# Altium PCB FPC_15ICS_80LEDS_150MM.PcbDoc (part 2 of 2)
Units mil, origin at the board's own origin, x right, y up, seen from the top; angles counter-clockwise.
Board outline 6000 x 4000 mil, 2 copper layers (Top Layer, Bottom Layer); 126 components, 275 nets, 763 pads, 146 vias.
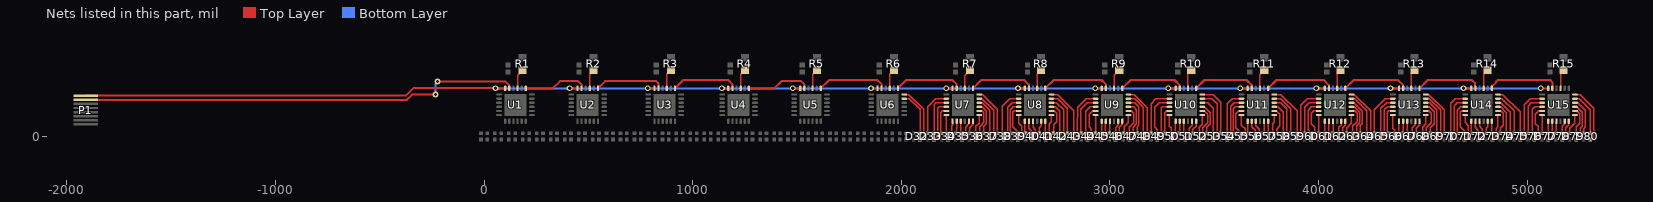
[diagram p2: the nets of this part, all layers, seen from the top]

## Via types
v1: diameter 27.56, hole 15.75, Top Layer to Bottom Layer, tented both sides, 146 vias

## Nets (pads, with @x,y where several pads share a name; then routed paths per layer and width w, separated by ;. In a path a pad name is that pad's centre, name@x,y a point inside that pad or via, vN(x,y) a via of type N, cw(c..) or ccw(c..) an arc to the next point about the centre after c; other vN are vias at no path point) (continued)
NetD32_3: D32.3 U6.17 | length 212.1
  Top Layer w6: U6.17@2013.74,180.79 2039.21,180.79 2089.96,130.04 D32.3@2089.96,15.16
NetD32_4: D32.4 U6.18 | length 275.4
  Top Layer w6: U6.18@2013.74,200.47 2036.5,200.47 2107.82,129.15 2107.82,2.57 2090.09,-15.16 D32.4@2089.96,-15.16
NetD33_2: D33.2 U7.2 | length 232.3
  Top Layer w6: D33.2@2126.57,15.16 2126.57,141.57 2165.79,180.79 U7.2@2216.26,180.79
NetD33_3: D33.3 U7.3 | length 199.9
  Top Layer w6: D33.3@2156.89,15.16 2156.89,151.89 2166.1,161.1 U7.3@2216.26,161.1
NetD33_4: D33.4 U7.4 | length 201.7
  Top Layer w6: D33.4@2156.89,-15.16 2157.02,-15.16 2174.75,2.57 2174.75,134.75 2181.42,141.42 U7.4@2216.26,141.42
NetD34_2: D34.2 U7.5 | length 131.6
  Top Layer w6: D34.2@2193.5,15.16 2188.48,20.18 2188.48,113.48 2196.73,121.73 U7.5@2216.26,121.73
NetD34_3: D34.3 U7.6 | length 90
  Top Layer w6: U7.6@2216.26,102.05 2216.26,22.72 D34.3@2223.82,15.16
NetD34_4: D34.4 U7.7 | length 97.4
  Top Layer w6: D34.4@2223.82,-15.16 2224.84,-15.16 2241.68,1.68 2241.68,51.68 2245.79,55.79 U7.7@2245.79,72.52
NetD35_2: D35.2 U7.8 | length 59.4
  Top Layer w6: D35.2@2260.43,15.16 2265.47,20.2 U7.8@2265.47,72.52
NetD35_3: D35.3 U7.9 | length 59.7
  Top Layer w6: U7.9@2285.16,72.52 2285.16,20.75 D35.3@2290.75,15.16
NetD35_4: D35.4 U7.11 | length 104.1
  Top Layer w6: D35.4@2290.75,-15.16 2294.84,-15.16 2308.61,-1.39 2308.61,43.61 2324.53,59.53 U7.11@2324.53,72.52
NetD36_2: D36.2 U7.12 | length 64.3
  Top Layer w6: D36.2@2327.36,15.16 2327.36,42.36 2344.21,59.21 U7.12@2344.21,72.52
NetD36_3: D36.3 U7.13 | length 93.5
  Top Layer w6: D36.3@2357.68,15.16 2357.68,47.68 2373.74,63.74 U7.13@2373.74,102.05
NetD36_4: D36.4 U7.14 | length 171.3
  Top Layer w6: D36.4@2357.68,-15.16 2358.34,-15.16 2375.54,2.04 2375.54,45.54 2396.52,66.52 2396.52,113.48 2388.27,121.73 U7.14@2373.74,121.73
NetD37_2: D37.2 U7.15 | length 155.3
  Top Layer w6: U7.15@2373.74,141.42 2388.58,141.42 2408.52,121.48 2408.52,61.55 2394.29,47.32 D37.2@2394.29,15.16
NetD37_3: D37.3 U7.16 | length 175.9
  Top Layer w6: U7.16@2373.74,161.1 2388.9,161.1 2424.61,125.39 D37.3@2424.61,15.16
NetD37_4: D37.4 U7.17 | length 239.2
  Top Layer w6: U7.17@2373.74,180.79 2386.18,180.79 2442.47,124.5 2442.47,2.47 2424.84,-15.16 D37.4@2424.61,-15.16
NetD38_2: D38.2 U7.18 | length 230.8
  Top Layer w6: U7.18@2373.74,200.47 2389.53,200.47 2461.22,128.78 D38.2@2461.22,15.16
NetD38_3: D38.3 U8.2 | length 225
  Top Layer w6: D38.3@2491.54,15.16 2485,21.7 2485,145 2520.79,180.79 U8.2@2562.6,180.79
NetD38_4: D38.4 U8.3 | length 224.2
  Top Layer w6: D38.4@2491.54,-15.16 2491.66,-15.16 2510,3.18 2510,140 2531.1,161.1 U8.3@2562.6,161.1
NetD39_2: D39.2 U8.4 | length 161
  Top Layer w6: D39.2@2528.15,15.16 2522,21.31 2522,127 2536.42,141.42 U8.4@2562.6,141.42
NetD39_3: D39.3 U8.5 | length 139.9
  Top Layer w6: D39.3@2558.47,15.16 2558.47,21.53 2535,45 2535,115 2541.73,121.73 U8.5@2562.6,121.73
NetD39_4: D39.4 U8.6 | length 130.4
  Top Layer w6: D39.4@2558.47,-15.16 2558.59,-15.16 2576.33,2.57 2576.33,48.67 2562.6,62.4 U8.6@2562.6,102.05
NetD40_2: D40.2 U8.7 | length 58.6
  Top Layer w6: U8.7@2592.13,72.52 2592.13,18.11 D40.2@2595.08,15.16
NetD40_3: D40.3 U8.8 | length 63
  Top Layer w6: U8.8@2611.81,72.52 2611.81,38.19 2625.4,24.6 D40.3@2625.4,15.16
NetD40_4: D40.4 U8.9 | length 100
  Top Layer w6: D40.4@2625.4,-15.16 2625.52,-15.16 2643.25,2.57 2643.25,31.75 2631.5,43.5 U8.9@2631.5,72.52
NetD41_2: D41.2 U8.11 | length 61
  Top Layer w6: D41.2@2662.01,15.16 2662.01,42.01 2670.87,50.87 U8.11@2670.87,72.52
NetD41_3: D41.3 U8.12 | length 58.1
  Top Layer w6: U8.12@2690.55,72.52 2690.55,16.93 D41.3@2692.33,15.16
NetD41_4: D41.4 U8.13 | length 128.9
  Top Layer w6: D41.4@2692.33,-15.16 2692.45,-15.16 2710.18,2.57 2710.18,27.75 2710,27.93 2710,60 2720.08,70.08 U8.13@2720.08,102.05
NetD42_2: D42.2 U8.14 | length 131.3
  Top Layer w6: U8.14@2720.08,121.73 2733.27,121.73 2745,110 2745,70 2730,55 2730,16.23 D42.2@2728.93,15.16
NetD42_3: D42.3 U8.15 | length 153.9
  Top Layer w6: U8.15@2720.08,141.42 2738.58,141.42 2760,120 2760,15.91 D42.3@2759.25,15.16
NetD42_4: D42.4 U8.16 | length 222
  Top Layer w6: U8.16@2720.08,161.1 2743.9,161.1 2778.01,126.99 2778.01,3.47 2759.38,-15.16 D42.4@2759.25,-15.16
NetD43_2: D43.2 U8.17 | length 214.1
  Top Layer w6: U8.17@2720.08,180.79 2749.21,180.79 2795.86,134.14 D43.2@2795.86,15.16
NetD43_3: D43.3 U8.18 | length 246.5
  Top Layer w6: U8.18@2720.08,200.47 2749.53,200.47 2826.18,123.82 D43.3@2826.18,15.16
NetD43_4: D43.4 U9.2 | length 266.5
  Top Layer w6: D43.4@2826.18,-15.16 2826.31,-15.16 2844.04,2.57 2844.04,89.04 2845,90 2845,140 2885.79,180.79 U9.2@2931.54,180.79
NetD44_2: D44.2 U9.3 | length 200.4
  Top Layer w6: D44.2@2862.79,15.16 2860,17.95 2860,130 2891.1,161.1 U9.3@2931.54,161.1
NetD44_3: D44.3 U9.4 | length 163.6
  Top Layer w6: D44.3@2893.11,15.16 2885,23.27 2885,120 2906.42,141.42 U9.4@2931.54,141.42
NetD44_4: D44.4 U9.5 | length 170.6
  Top Layer w6: D44.4@2893.11,-15.16 2893.24,-15.16 2910.97,2.57 2910.97,34.03 2900,45 2900,105 2916.73,121.73 U9.5@2931.54,121.73
NetD45_2: D45.2 U9.6 | length 87.6
  Top Layer w6: D45.2@2929.72,15.16 2931.54,16.97 U9.6@2931.54,102.05
NetD45_3: D45.3 U9.7 | length 57.8
  Top Layer w6: D45.3@2960.04,15.16 2961.06,16.18 U9.7@2961.06,72.52
NetD45_4: D45.4 U9.8 | length 96.3
  Top Layer w6: D45.4@2960.04,-15.16 2960.17,-15.16 2977.9,2.57 2977.9,69.67 U9.8@2980.75,72.52
NetD46_2: D46.2 U9.9 | length 58.9
  Top Layer w6: D46.2@2996.65,15.16 3000.43,18.94 U9.9@3000.43,72.52
NetD46_3: D46.3 U9.11 | length 62.7
  Top Layer w6: D46.3@3026.97,15.16 3026.97,41.97 3039.8,54.8 U9.11@3039.8,72.52
NetD46_4: D46.4 U9.12 | length 101.2
  Top Layer w6: D46.4@3026.97,-15.16 3027.1,-15.16 3044.83,2.57 3044.83,42.86 3059.49,57.52 U9.12@3059.49,72.52
NetD47_2: D47.2 U9.13 | length 97.4
  Top Layer w6: D47.2@3063.58,15.16 3070,21.58 3070,45 3089.02,64.02 U9.13@3089.02,102.05
NetD47_3: D47.3 U9.14 | length 134.4
  Top Layer w6: U9.14@3089.02,121.73 3103.27,121.73 3115,110 3115,65 3093.9,43.9 D47.3@3093.9,15.16
NetD47_4: D47.4 U9.15 | length 200.5
  Top Layer w6: U9.15@3089.02,141.42 3113.58,141.42 3127,128 3127,60.03 3111.76,44.79 3111.76,2.57 3094.03,-15.16 D47.4@3093.9,-15.16
NetD48_2: D48.2 U9.16 | length 187.7
  Top Layer w6: U9.16@3089.02,161.1 3118.9,161.1 3139,141 3139,55.06 3130.51,46.57 D48.2@3130.51,15.16
NetD48_3: D48.3 U9.17 | length 213.1
  Top Layer w6: U9.17@3089.02,180.79 3119.21,180.79 3160,140 3160,15.99 D48.3@3160.83,15.16
NetD48_4: D48.4 U9.18 | length 276.3
  Top Layer w6: U9.18@3089.02,200.47 3116.5,200.47 3172,144.97 3172,143 3178.69,136.31 3178.69,2.57 3160.95,-15.16 D48.4@3160.83,-15.16
NetD49_2: D49.2 U10.2 | length 240.3
  Top Layer w6: D49.2@3197.44,15.16 3197.44,157.44 3220.79,180.79 U10.2@3285.79,180.79
NetD49_3: D49.3 U10.3 | length 209.7
  Top Layer w6: D49.3@3227.76,15.16 3227.76,32.24 3215,45 3215,140 3236.1,161.1 U10.3@3285.79,161.1
NetD49_4: D49.4 U10.4 | length 200.8
  Top Layer w6: D49.4@3227.76,-15.16 3227.88,-15.16 3246.51,3.47 3246.51,136.51 3251.42,141.42 U10.4@3285.79,141.42
NetD50_2: D50.2 U10.5 | length 125.6
  Top Layer w6: D50.2@3264.37,15.16 3263.01,15.16 3263.01,113.01 3271.73,121.73 U10.5@3285.79,121.73
NetD50_3: D50.3 U10.6 | length 90.6
  Top Layer w6: U10.6@3285.79,102.05 3285.79,49.21 3294.69,40.31 D50.3@3294.69,15.16
NetD50_4: D50.4 U10.7 | length 96.3
  Top Layer w6: D50.4@3294.69,-15.16 3294.81,-15.16 3312.55,2.57 3312.55,69.75 U10.7@3315.32,72.52
NetD51_2: D51.2 U10.8 | length 58.9
  Top Layer w6: D51.2@3331.3,15.16 3335,18.86 U10.8@3335,72.52
NetD51_3: D51.3 U10.9 | length 60.2
  Top Layer w6: U10.9@3354.69,72.52 3354.69,22.09 D51.3@3361.62,15.16
NetD51_4: D51.4 U10.11 | length 101.2
  Top Layer w6: D51.4@3361.62,-15.16 3361.74,-15.16 3379.48,2.57 3379.48,39.48 3394.06,54.06 U10.11@3394.06,72.52
NetD52_2: D52.2 U10.12 | length 63.8
  Top Layer w6: D52.2@3398.23,15.16 3398.23,33.23 3413.74,48.74 U10.12@3413.74,72.52
NetD52_3: D52.3 U10.13 | length 93
  Top Layer w6: D52.3@3428.55,15.16 3428.55,43.55 3443.27,58.27 U10.13@3443.27,102.05
NetD52_4: D52.4 U10.14 | length 171.1
  Top Layer w6: D52.4@3428.55,-15.16 3428.67,-15.16 3446.4,2.57 3446.4,41.4 3470,65 3470,105 3453.27,121.73 U10.14@3443.27,121.73
NetD53_2: D53.2 U10.15 | length 155.4
  Top Layer w6: U10.15@3443.27,141.42 3453.58,141.42 3482,113 3482,60.03 3465,43.03 3465,15.31 D53.2@3465.15,15.16
NetD53_3: D53.3 U10.16 | length 182.6
  Top Layer w6: U10.16@3443.27,161.1 3468.9,161.1 3495.47,134.53 D53.3@3495.47,15.16
NetD53_4: D53.4 U10.17 | length 260.1
  Top Layer w6: U10.17@3443.27,180.79 3489.21,180.79 3514.23,155.77 3514.23,3.47 3495.6,-15.16 D53.4@3495.47,-15.16
NetD54_2: D54.2 U10.18 | length 252.1
  Top Layer w6: U10.18@3443.27,200.47 3494.53,200.47 3532.08,162.92 D54.2@3532.08,15.16
NetD54_3: D54.3 U11.2 | length 220.3
  Top Layer w6: D54.3@3562.4,15.16 3562.4,157.4 3585.79,180.79 U11.2@3630.79,180.79
NetD54_4: D54.4 U11.3 | length 225
  Top Layer w6: D54.4@3562.4,-15.16 3562.53,-15.16 3580.26,2.57 3580.26,145.26 3596.1,161.1 U11.3@3630.79,161.1
NetD55_2: D55.2 U11.4 | length 162.2
  Top Layer w6: D55.2@3599.01,15.16 3592.26,21.91 3592.26,132.26 3601.42,141.42 U11.4@3630.79,141.42
NetD55_3: D55.3 U11.5 | length 136.2
  Top Layer w6: D55.3@3629.33,15.16 3629.33,15.67 3604.26,40.74 3604.26,109.26 3616.73,121.73 U11.5@3630.79,121.73
NetD55_4: D55.4 U11.6 | length 135.4
  Top Layer w6: D55.4@3629.33,-15.16 3634.84,-15.16 3648.08,-1.92 3648.08,36.92 3630.79,54.21 U11.6@3630.79,102.05
NetD56_2: D56.2 U11.7 | length 59.7
  Top Layer w6: U11.7@3660.32,72.52 3660.32,20.79 D56.2@3665.94,15.16
NetD56_3: D56.3 U11.8 | length 64.1
  Top Layer w6: U11.8@3680,72.52 3680,45 3696.26,28.74 D56.3@3696.26,15.16
NetD56_4: D56.4 U11.9 | length 101.9
  Top Layer w6: D56.4@3696.26,-15.16 3696.39,-15.16 3715,3.45 3715,35 3699.69,50.31 U11.9@3699.69,72.52
NetD57_2: D57.2 U11.11 | length 59.9
  Top Layer w6: D57.2@3732.87,15.16 3739.06,21.34 U11.11@3739.06,72.52
NetD57_3: D57.3 U11.12 | length 59.2
  Top Layer w6: U11.12@3758.74,72.52 3758.74,19.61 D57.3@3763.19,15.16
NetD57_4: D57.4 U11.13 | length 127.7
  Top Layer w6: D57.4@3763.19,-15.16 3763.32,-15.16 3781.05,2.57 3781.05,61.05 3788.27,68.27 U11.13@3788.27,102.05
NetD58_2: D58.2 U11.14 | length 129.8
  Top Layer w6: U11.14@3788.27,121.73 3798.27,121.73 3815,105 3815,50 3799.8,34.8 D58.2@3799.8,15.16
NetD58_3: D58.3 U11.15 | length 152.6
  Top Layer w6: U11.15@3788.27,141.42 3803.58,141.42 3830.12,114.88 D58.3@3830.12,15.16
NetD58_4: D58.4 U11.16 | length 227.1
  Top Layer w6: U11.16@3788.27,161.1 3818.9,161.1 3848.87,131.13 3848.87,3.47 3830.25,-15.16 D58.4@3830.12,-15.16
NetD59_2: D59.2 U11.17 | length 216.3
  Top Layer w6: U11.17@3788.27,180.79 3819.21,180.79 3866.73,133.27 D59.2@3866.73,15.16
NetD59_3: D59.3 U11.18 | length 248.7
  Top Layer w6: U11.18@3788.27,200.47 3819.53,200.47 3897.05,122.95 D59.3@3897.05,15.16
NetD59_4: D59.4 U12.2 | length 271.2
  Top Layer w6: D59.4@3897.05,-15.16 3897.17,-15.16 3914.91,2.57 3914.91,149.91 3945.79,180.79 U12.2@4000.79,180.79
NetD60_2: D60.2 U12.3 | length 199.9
  Top Layer w6: D60.2@3933.66,15.16 3933.66,138.66 3956.1,161.1 U12.3@4000.79,161.1
NetD60_3: D60.3 U12.4 | length 173.2
  Top Layer w6: D60.3@3963.98,15.16 3963.98,15.28 3950,29.26 3950,125 3966.42,141.42 U12.4@4000.79,141.42
NetD60_4: D60.4 U12.5 | length 180.3
  Top Layer w6: D60.4@3963.98,-15.16 3964.1,-15.16 3981.84,2.57 3981.84,43.16 3965,60 3965,110 3976.73,121.73 U12.5@4000.79,121.73
NetD61_2: D61.2 U12.6 | length 87
  Top Layer w6: D61.2@4000.59,15.16 4000.79,15.36 U12.6@4000.79,102.05
NetD61_3: D61.3 U12.7 | length 57.6
  Top Layer w6: U12.7@4030.32,72.52 4030.32,15.75 D61.3@4030.91,15.16
NetD61_4: D61.4 U12.8 | length 95.7
  Top Layer w6: D61.4@4030.91,-15.16 4031.03,-15.16 4048.77,2.57 4048.77,71.29 U12.8@4050,72.52
NetD62_2: D62.2 U12.9 | length 58.3
  Top Layer w6: D62.2@4067.52,15.16 4069.69,17.33 U12.9@4069.69,72.52
NetD62_3: D62.3 U12.11 | length 62
  Top Layer w6: D62.3@4097.84,15.16 4097.84,42.84 4109.06,54.06 U12.11@4109.06,72.52
NetD62_4: D62.4 U12.12 | length 100.6
  Top Layer w6: D62.4@4097.84,-15.16 4097.96,-15.16 4115.7,2.57 4115.7,40.7 4128.74,53.74 U12.12@4128.74,72.52
NetD63_2: D63.2 U12.13 | length 96.6
  Top Layer w6: D63.2@4134.84,15.16 4134.84,39.84 4158.27,63.27 U12.13@4158.27,102.05
NetD63_3: D63.3 U12.14 | length 134.6
  Top Layer w6: U12.14@4158.27,121.73 4173.27,121.73 4185,110 4185,70 4165.16,50.16 D63.3@4165.16,15.16
NetD63_4: D63.4 U12.15 | length 193.1
  Top Layer w6: U12.15@4158.27,141.42 4170.55,141.42 4197,114.97 4197,65.03 4183.52,51.55 4183.52,3.07 4165.28,-15.16 D63.4@4165.16,-15.16
NetD64_2: D64.2 U12.16 | length 176.3
  Top Layer w6: U12.16@4158.27,161.1 4168.9,161.1 4209,121 4209,60.06 4201.38,52.43 D64.2@4201.38,15.16
NetD64_3: D64.3 U12.17 | length 205.4
  Top Layer w6: U12.17@4158.27,180.79 4174.21,180.79 4231.7,123.3 D64.3@4231.7,15.16
NetD64_4: D64.4 U12.18 | length 269
  Top Layer w6: U12.18@4158.27,200.47 4171.5,200.47 4250,121.97 4250,3.02 4231.82,-15.16 D64.4@4231.7,-15.16
NetD65_2: D65.2 U13.2 | length 223.3
  Top Layer w6: D65.2@4268.3,15.16 4268.3,128.3 4320.79,180.79 U13.2@4356.73,180.79
NetD65_3: D65.3 U13.3 | length 188
  Top Layer w6: D65.3@4298.62,15.16 4298.62,133.62 4326.1,161.1 U13.3@4356.73,161.1
NetD65_4: D65.4 U13.4 | length 195.5
  Top Layer w6: D65.4@4298.62,-15.16 4298.75,-15.16 4316.48,2.57 4316.48,126.48 4331.42,141.42 U13.4@4356.73,141.42
NetD66_2: D66.2 U13.5 | length 131.5
  Top Layer w6: D66.2@4335.23,15.16 4330,20.39 4330,115 4336.73,121.73 U13.5@4356.73,121.73
NetD66_3: D66.3 U13.6 | length 90.5
  Top Layer w6: U13.6@4356.73,102.05 4356.73,38.27 4365.55,29.45 D66.3@4365.55,15.16
NetD66_4: D66.4 U13.7 | length 98.8
  Top Layer w6: D66.4@4365.55,-15.16 4369.84,-15.16 4384.3,-0.7 4384.3,70.56 U13.7@4386.26,72.52
NetD67_2: D67.2 U13.8 | length 58.9
  Top Layer w6: D67.2@4402.16,15.16 4405.94,18.94 U13.8@4405.94,72.52
NetD67_3: D67.3 U13.9 | length 60.2
  Top Layer w6: U13.9@4425.63,72.52 4425.63,22.01 D67.3@4432.48,15.16
NetD67_4: D67.4 U13.11 | length 101.2
  Top Layer w6: D67.4@4432.48,-15.16 4432.61,-15.16 4450.34,2.57 4450.34,40.34 4465,55 U13.11@4465,72.52
NetD68_2: D68.2 U13.12 | length 63.8
  Top Layer w6: D68.2@4469.09,15.16 4469.09,39.09 4484.68,54.68 U13.12@4484.68,72.52
NetD68_3: D68.3 U13.13 | length 93
  Top Layer w6: D68.3@4499.41,15.16 4499.41,44.41 4514.21,59.21 U13.13@4514.21,102.05
NetD68_4: D68.4 U13.14 | length 172.7
  Top Layer w6: D68.4@4499.41,-15.16 4499.54,-15.16 4517.27,2.57 4517.27,42.27 4540,65 4540,110 4528.27,121.73 U13.14@4514.21,121.73
NetD69_2: D69.2 U13.15 | length 160.6
  Top Layer w6: U13.15@4514.21,141.42 4530.55,141.42 4555,116.97 4555,60 4536.02,41.02 D69.2@4536.02,15.16
NetD69_3: D69.3 U13.16 | length 179.6
  Top Layer w6: U13.16@4514.21,161.1 4533.9,161.1 4567,128 4567,15.82 D69.3@4566.34,15.16
NetD69_4: D69.4 U13.17 | length 243
  Top Layer w6: U13.17@4514.21,180.79 4531.18,180.79 4585,126.97 4585,3.37 4566.47,-15.16 D69.4@4566.34,-15.16
NetD70_2: D70.2 U13.18 | length 231
  Top Layer w6: U13.18@4514.21,200.47 4529.53,200.47 4602.95,127.05 D70.2@4602.95,15.16
NetD70_3: D70.3 U14.2 | length 222.2
  Top Layer w6: D70.3@4633.27,15.16 4633.27,158.27 4655.79,180.79 U14.2@4703.07,180.79
NetD70_4: D70.4 U14.3 | length 226.9
  Top Layer w6: D70.4@4633.27,-15.16 4633.4,-15.16 4651.13,2.57 4651.13,146.13 4666.1,161.1 U14.3@4703.07,161.1
NetD71_2: D71.2 U14.4 | length 156.7
  Top Layer w6: D71.2@4669.88,15.16 4665,20.04 4665,125 4681.42,141.42 U14.4@4703.07,141.42
NetD71_3: D71.3 U14.5 | length 134.1
  Top Layer w6: D71.3@4700.2,15.16 4700.2,24.8 4680,45 4680,115 4686.73,121.73 U14.5@4703.07,121.73
NetD71_4: D71.4 U14.6 | length 133.5
  Top Layer w6: D71.4@4700.2,-15.16 4704.84,-15.16 4718.06,-1.94 4718.06,51.94 4703.07,66.93 U14.6@4703.07,102.05
NetD72_2: D72.2 U14.7 | length 59.1
  Top Layer w6: U14.7@4732.6,72.52 4732.6,19.37 D72.2@4736.81,15.16
NetD72_3: D72.3 U14.8 | length 63.5
  Top Layer w6: U14.8@4752.28,72.52 4752.28,42.72 4767.13,27.87 D72.3@4767.13,15.16
NetD72_4: D72.4 U14.9 | length 100.6
  Top Layer w6: D72.4@4767.13,-15.16 4767.25,-15.16 4785,2.59 4785,35 4771.97,48.03 U14.9@4771.97,72.52
NetD73_2: D73.2 U14.11 | length 60.5
  Top Layer w6: D73.2@4803.74,15.16 4803.74,38.74 4811.34,46.34 U14.11@4811.34,72.52
NetD73_3: D73.3 U14.12 | length 58.6
  Top Layer w6: U14.12@4831.02,72.52 4831.02,18.19 D73.3@4834.06,15.16
NetD73_4: D73.4 U14.13 | length 128.3
  Top Layer w6: D73.4@4834.06,-15.16 4834.18,-15.16 4851.92,2.57 4851.92,36.92 4860.55,45.55 U14.13@4860.55,102.05
NetD74_2: D74.2 U14.14 | length 130.1
  Top Layer w6: U14.14@4860.55,121.73 4873.27,121.73 4885,110 4885,53.03 4870.67,38.7 D74.2@4870.67,15.16
NetD74_3: D74.3 U14.15 | length 150.6
  Top Layer w6: U14.15@4860.55,141.42 4873.58,141.42 4900.99,114.01 D74.3@4900.99,15.16
NetD74_4: D74.4 U14.16 | length 216.4
  Top Layer w6: U14.16@4860.55,161.1 4873.9,161.1 4919.74,115.26 4919.74,3.47 4901.11,-15.16 D74.4@4900.99,-15.16
NetD75_2: D75.2 U14.17 | length 208.5
  Top Layer w6: U14.17@4860.55,180.79 4879.21,180.79 4937.6,122.4 D75.2@4937.6,15.16
NetD75_3: D75.3 U14.18 | length 243.8
  Top Layer w6: U14.18@4860.55,200.47 4884.53,200.47 4967.92,117.08 D75.3@4967.92,15.16
NetD75_4: D75.4 U15.2 | length 272.1
  Top Layer w6: D75.4@4967.92,-15.16 4968.04,-15.16 4985.77,2.57 4985.77,150.77 5015.79,180.79 U15.2@5072.01,180.79
NetD76_2: D76.2 U15.3 | length 203.7
  Top Layer w6: D76.2@5004.53,15.16 5004.53,144.53 5021.1,161.1 U15.3@5072.01,161.1
NetD76_3: D76.3 U15.4 | length 170.7
  Top Layer w6: D76.3@5034.85,15.16 5025,25.01 5025,130 5036.42,141.42 U15.4@5072.01,141.42
NetD76_4: D76.4 U15.5 | length 171.8
  Top Layer w6: D76.4@5034.85,-15.16 5034.97,-15.16 5052.7,2.57 5052.7,47.3 5040,60 5040,105 5056.73,121.73 U15.5@5072.01,121.73
NetD77_2: D77.2 U15.6 | length 87.1
  Top Layer w6: D77.2@5071.45,15.16 5072.01,15.71 U15.6@5072.01,102.05
NetD77_3: D77.3 U15.7 | length 57.5
  Top Layer w6: U15.7@5101.54,72.52 5101.54,15.4 D77.3@5101.77,15.16
NetD77_4: D77.4 U15.8 | length 97.5
  Top Layer w6: D77.4@5101.77,-15.16 5104.84,-15.16 5120.52,0.52 5120.52,71.82 U15.8@5121.22,72.52
NetD78_2: D78.2 U15.9 | length 58.4
  Top Layer w6: D78.2@5138.38,15.16 5140.91,17.68 U15.9@5140.91,72.52
NetD78_3: D78.3 U15.11 | length 62.2
  Top Layer w6: D78.3@5168.7,15.16 5168.7,48.7 5180.28,60.28 U15.11@5180.28,72.52
NetD78_4: D78.4 U15.12 | length 100.7
  Top Layer w6: D78.4@5168.7,-15.16 5168.83,-15.16 5186.56,2.57 5186.56,41.56 5199.96,54.96 U15.12@5199.96,72.52
NetD79_2: D79.2 U15.13 | length 96.9
  Top Layer w6: D79.2@5205.31,15.16 5205.31,38.34 5229.49,62.52 U15.13@5229.49,102.05
NetD79_3: D79.3 U15.14 | length 128.2
  Top Layer w6: U15.14@5229.49,121.73 5238.59,121.73 5252.27,108.06 5252.27,62.27 5235.63,45.63 D79.3@5235.63,15.16
NetD79_4: D79.4 U15.15 | length 189.1
  Top Layer w6: U15.15@5229.49,141.42 5238.59,141.42 5264.27,115.74 5264.27,49.27 5254.38,39.38 5254.38,1.96 5237.27,-15.16 D79.4@5235.63,-15.16
NetD80_2: D80.2 U15.16 | length 178.5
  Top Layer w6: U15.16@5229.49,161.1 5243.9,161.1 5280,125 5280,45 5272.24,37.24 D80.2@5272.24,15.16
NetD80_3: D80.3 U15.17 | length 207.4
  Top Layer w6: U15.17@5229.49,180.79 5249.21,180.79 5302.56,127.44 D80.3@5302.56,15.16
NetD80_4: D80.4 U15.18 | length 279.6
  Top Layer w6: U15.18@5229.49,200.47 5254.53,200.47 5320.42,134.58 5320.42,-4.58 5309.84,-15.16 D80.4@5302.56,-15.16
NetR1_1: R1.1 U1.21 | length 97
  Top Layer w7: U1.21@160.31,230 160.31,292.05 R1.1@185,316.73
NetR2_1: R2.1 U2.21 | length 94.3
  Top Layer w7: U2.21@506.65,230 506.65,298.39 R2.1@525,316.73
NetR3_1: R3.1 U3.21 | length 94.8
  Top Layer w7: U3.21@875.59,230 875.59,297.32 R3.1@895,316.73
NetR4_1: R4.1 U4.21 | length 95.1
  Top Layer w7: U4.21@1229.84,230 1229.84,296.57 R4.1@1250,316.73
NetR5_1: R5.1 U5.21 | length 95.1
  Top Layer w7: U5.21@1574.84,230 1574.84,296.57 R5.1@1595,316.73
NetR6_1: R6.1 U6.21 | length 95.1
  Top Layer w7: U6.21@1944.84,230 1944.84,296.57 R6.1@1965,316.73
NetR7_1: R7.1 U7.21 | length 97.2
  Top Layer w7: U7.21@2304.84,230 2304.84,291.57 R7.1@2330,316.73
NetR8_1: R8.1 U8.21 | length 94.5
  Top Layer w7: U8.21@2651.18,230 2651.18,297.91 R8.1@2670,316.73
NetR9_1: R9.1 U9.21 | length 97
  Top Layer w7: U9.21@3020.12,230 3020.12,291.85 R9.1@3045,316.73
NetR10_1: R10.1 U10.21 | length 93.2
  Top Layer w7: U10.21@3374.37,230 3374.37,301.1 R10.1@3390,316.73
NetR11_1: R11.1 U11.21 | length 95.3
  Top Layer w7: U11.21@3719.37,230 3719.37,296.1 R11.1@3740,316.73
NetR12_1: R12.1 U12.21 | length 93.2
  Top Layer w7: U12.21@4089.37,230 4089.37,301.1 R12.1@4105,316.73
NetR13_1: R13.1 U13.21 | length 92.8
  Top Layer w7: U13.21@4445.31,230 4445.31,302.05 R13.1@4460,316.73
NetR14_1: R14.1 U14.21 | length 94.3
  Top Layer w7: U14.21@4791.65,230 4791.65,298.39 R14.1@4810,316.73
NetR15_1: R15.1 U15.21 | length 92.7
  Top Layer w6: U15.21@5160.59,230 5160.59,302.32 R15.1@5175,316.73
NetU1_19: U1.19 U2.23 | length 307
  Top Layer w10: U1.19@199.68,230 330,230 365,265 450,265 467.28,247.72 U2.23@467.28,230
NetU2_19: U2.19 U3.23 | length 333.1
  Top Layer w10: U2.19@546.02,230 581.02,265 825,265 836.22,253.78 U3.23@836.22,230
NetU3_19: U3.19 U4.23 | length 320.1
  Top Layer w10: U3.19@914.96,230 954.96,270 1170,270 1190.47,249.53 U4.23@1190.47,230
NetU4_19: U4.19 U5.23 | length 306.7
  Top Layer w10: U4.19@1269.21,230 1391,230 1426,265 1520,265 1535.47,249.53 U5.23@1535.47,230
NetU5_19: U5.19 U6.23 | length 335.8
  Top Layer w10: U5.19@1614.21,230 1654.21,270 1885,270 1905.47,249.53 U6.23@1905.47,230
NetU7_19: U7.19 U8.23 | length 311.4
  Top Layer w10: U7.19@2344.21,230 2384.21,270 2590,270 2611.81,248.19 U8.23@2611.81,230
NetU8_19: U8.19 U9.23 | length 334.6
  Top Layer w10: U8.19@2690.55,230 2730.55,270 2960,270 2980.75,249.25 U9.23@2980.75,230
NetU9_19: U9.19 U10.23 | length 317.3
  Top Layer w10: U9.19@3059.49,230 3099.49,270 3309.76,270 3335,244.76 U10.23@3335,230
NetU10_19: U10.19 U11.23 | length 308.2
  Top Layer w10: U10.19@3413.74,230 3453.74,270 3655,270 3680,245 U11.23@3680,230
NetU11_19: U11.19 U12.23 | length 333.2
  Top Layer w10: U11.19@3758.74,230 3798.74,270 4025,270 4050,245 U12.23@4050,230
NetU13_19: U13.19 U14.23 | length 314
  Top Layer w10: U13.19@4484.68,230 4524.68,270 4735,270 4751.11,253.89 4751.11,231.17 U14.23@4752.28,230
NetU14_19: U14.19 U15.23 | length 348.3
  Top Layer w10: U14.19@4831.02,230 4831.02,241.02 4833.22,243.22 4836.09,243.22 4851.78,258.91 4851.78,261.78 4860,270 5110,270 5121.22,258.78 U15.23@5121.22,230
SDO_LEFT_1: U6.19 U7.23 | length 325.8
  Top Layer w10: U6.19@1984.21,230 2024.21,270 2245,270 2265.47,249.53 U7.23@2265.47,230
SDO_LEFT_2: U12.19 U13.23 | length 319
  Top Layer w10: U12.19@4128.74,230 4168.74,270 4380.71,270 4405.94,244.76 U13.23@4405.94,230
SPI1_MOSI: P1.2 U1.23 | length 2118.9
  Top Layer w10: P1.2@-1910,175.2 -369.35,175.2 -344.54,200 v1@-233,200 ; v1(-223.53,262.47) 103.23,262.47 120.94,244.76 U1.23@120.94,230
  Bottom Layer w10: v1(-232.53,200.47) -232.53,250.47 -224,259 v1@-224,262
SPI1_SCK: P1.1 U1.24 U2.24 U3.24 U4.24 U5.24 U6.24 U7.24 U8.24 U9.24 U10.24 U11.24 U12.24 U13.24 U14.24 U15.24 | length 7523.4
  Top Layer w10: P1.1@-1910,194.88 -375.12,194.88 -339,231 54,231 v1(55,230) U1.24@101.26,230 ; v1(410,230) U2.24@447.6,230 ; v1(785,230) U3.24@816.54,230 ; v1(1140,230) U4.24@1170.79,230 ; v1(1480,230) U5.24@1515.79,230 ; v1(1855,230) U6.24@1885.79,230 ; v1(2215,230) U7.24@2245.79,230 ; v1(2560,230) U8.24@2592.13,230 ; v1(2930,230) U9.24@2961.06,230 ; v1(3280,230) U10.24@3315.32,230 ; v1(3625,230) U11.24@3660.32,230 ; v1(3990,230) U12.24@4030.32,230 ; v1(4345,230) U13.24@4386.26,230 ; v1(4695,230) U14.24@4732.6,230 ; v1(5065,230) U15.24@5101.54,230
  Bottom Layer w10: v1(55,230) v1(410,230) v1(785,230) v1(1140,230) v1(1480,230) v1(1855,230) v1(2215,230) v1(2560,230) v1(2930,230) v1(3280,230) v1(3625,230) v1(3990,230) v1(4345,230) v1(4695,230) v1(5065,230)
pads on no net: U15.19

## Polygon pours and split planes (outlines as drawn)
4V1 on Top Layer "Top Layer-No Net" (solid, remove dead copper, pour order 2): -27,-6 -27,-73 5344,-73 5364,-53 5364,-15 5354,-5 -27,-5
4V1 on Top Layer "Top Layer-No Net" (solid, remove dead copper, pour order 4): -1899,82 -121,82 -36,-3 -34,-5 -1.7,-5 5354,-5 5364,-15 5364,-53 5344,-73 -27,-73 -320,-73 -346,-47 -412.71,19.71 ccw(c-483.42,-50.99) -483.42,49 -503,49 -1899,49
GND on Top Layer "Top Layer-No Net" (solid, remove dead copper, pour order 6): -1897,122 -1897,91 -1897,92 -1551,92 -116,92 -54,30 -30,30 15,183 -138,187 -138,145 -146,122 -161,122
GND on Bottom Layer "Top Layer-No Net" (solid, remove dead copper, pour order 8): -245,393 -238,400 5212,400 5340,400 5366,374 5425,315 5425,-61 5416,-70 5411,-75 5344,-75 -311,-75 -316,-70 -433,47 -433,202 -394,241

## Keep-outs
Keep-Out Layer:
  circle w10: c1377.96,366.14 r35.43
  circle w10: c669.25,-116.97 r35.43
  circle w10: c1732.25,-116.97 r35.43
  circle w10: c5275.59,366.14 r35.43
  circle w10: c2795.25,-116.97 r35.43
  circle w10: c3858.25,-116.97 r35.43
  circle w10: c4921.25,-116.97 r35.43
  circle w10: c5275.59,-118.11 r35.43
  circle w10: c314.96,366.14 r35.43

## Silkscreen, mask and mechanical layers (free items; w line width, h text height)
Top Overlay:
  lines w7.87: 0,0 5439,0
  text "0" at 5306,-72 h30
  text "5" at 243,-89 h30
  text "0" at 579,-89 h30
  text "5" at 4961,-89 h30
  text "0" at 2586,-91 h30
  text "5" at 913,-92 h30
  text "0" at 1247,-92 h30
  text "5" at 1582,-92 h30
  text "5" at 2251,-93 h30
  text "0" at 3254,-94 h30
  text "0" at 4592,-96 h30
  text "5" at 3589,-98 h30
  text "0" at 1917,-99 h30
  text "5" at 2919,-99 h30
  text "0" at 3926,-99 h30
  text "5" at 4259,-101 h30
  text "8" at 5331,-139 h30
  text "7" at 4979,-142 h30
  text "5" at 3256,-143 h30
  text "5" at 3591,-146 h30
  text "7" at 4591,-146 h30
  text "1" at 923,-147 h30
  text "2" at 1584,-147 h30
  text "3" at 2253,-147 h30
  text "6" at 3925,-147 h30
  text "4" at 2590,-148 h30
  text "1" at 585,-149 h30
  text "2" at 1249,-149 h30
  text "3" at 1921,-151 h30
  text "4" at 2920,-151 h30
  text "6" at 4259,-152 h30
Mechanical 1:
  circle w10: c1377.96,366.14 r35.43
  circle w10: c1732.25,-116.97 r35.43
  circle w10: c669.25,-116.97 r35.43
  circle w10: c5275.59,-118.11 r35.43
  circle w10: c2795.25,-116.97 r35.43
  circle w10: c3858.25,-116.97 r35.43
  circle w10: c4921.25,-116.97 r35.43
  circle w10: c5275.59,366.14 r35.43
  circle w10: c314.96,366.14 r35.43
  lines w3.94: -497,37 -491.18,37 ; -497,211 -497,214 -491.18,214 ; -228,-170.26 cw(c-224.96,-173.3) -224.96,-169
  lines w7.87: -497,37 -1974,37 -1974,214 -497,214 ; -491.18,37 cw(c-491.18,-55.18) -426,10 -283.89,-147.11 ccw(c-228,-91.22) -224.91,-170.2 ; -491.18,214 ccw(c-491.18,306.18) -426,241 -283.89,398.11 cw(c-228,342.22) -228,421.26 ; -230,421.26 -154.25,421.26 ; -224.96,-169 -1,-169 7,-169 5316,-169 ccw(c5327.12,-56.12) 5440,-67.25 5440,-32 5440,325 5440,306 ; -154,421.26 -154.25,421.26 ; 5439.75,304.26 ccw(c5325.38,306.88) 5328,421.26 -154.25,421.26